# EAGLE board Panel EKO2 (EAGLE 5.10), part 1 of 2
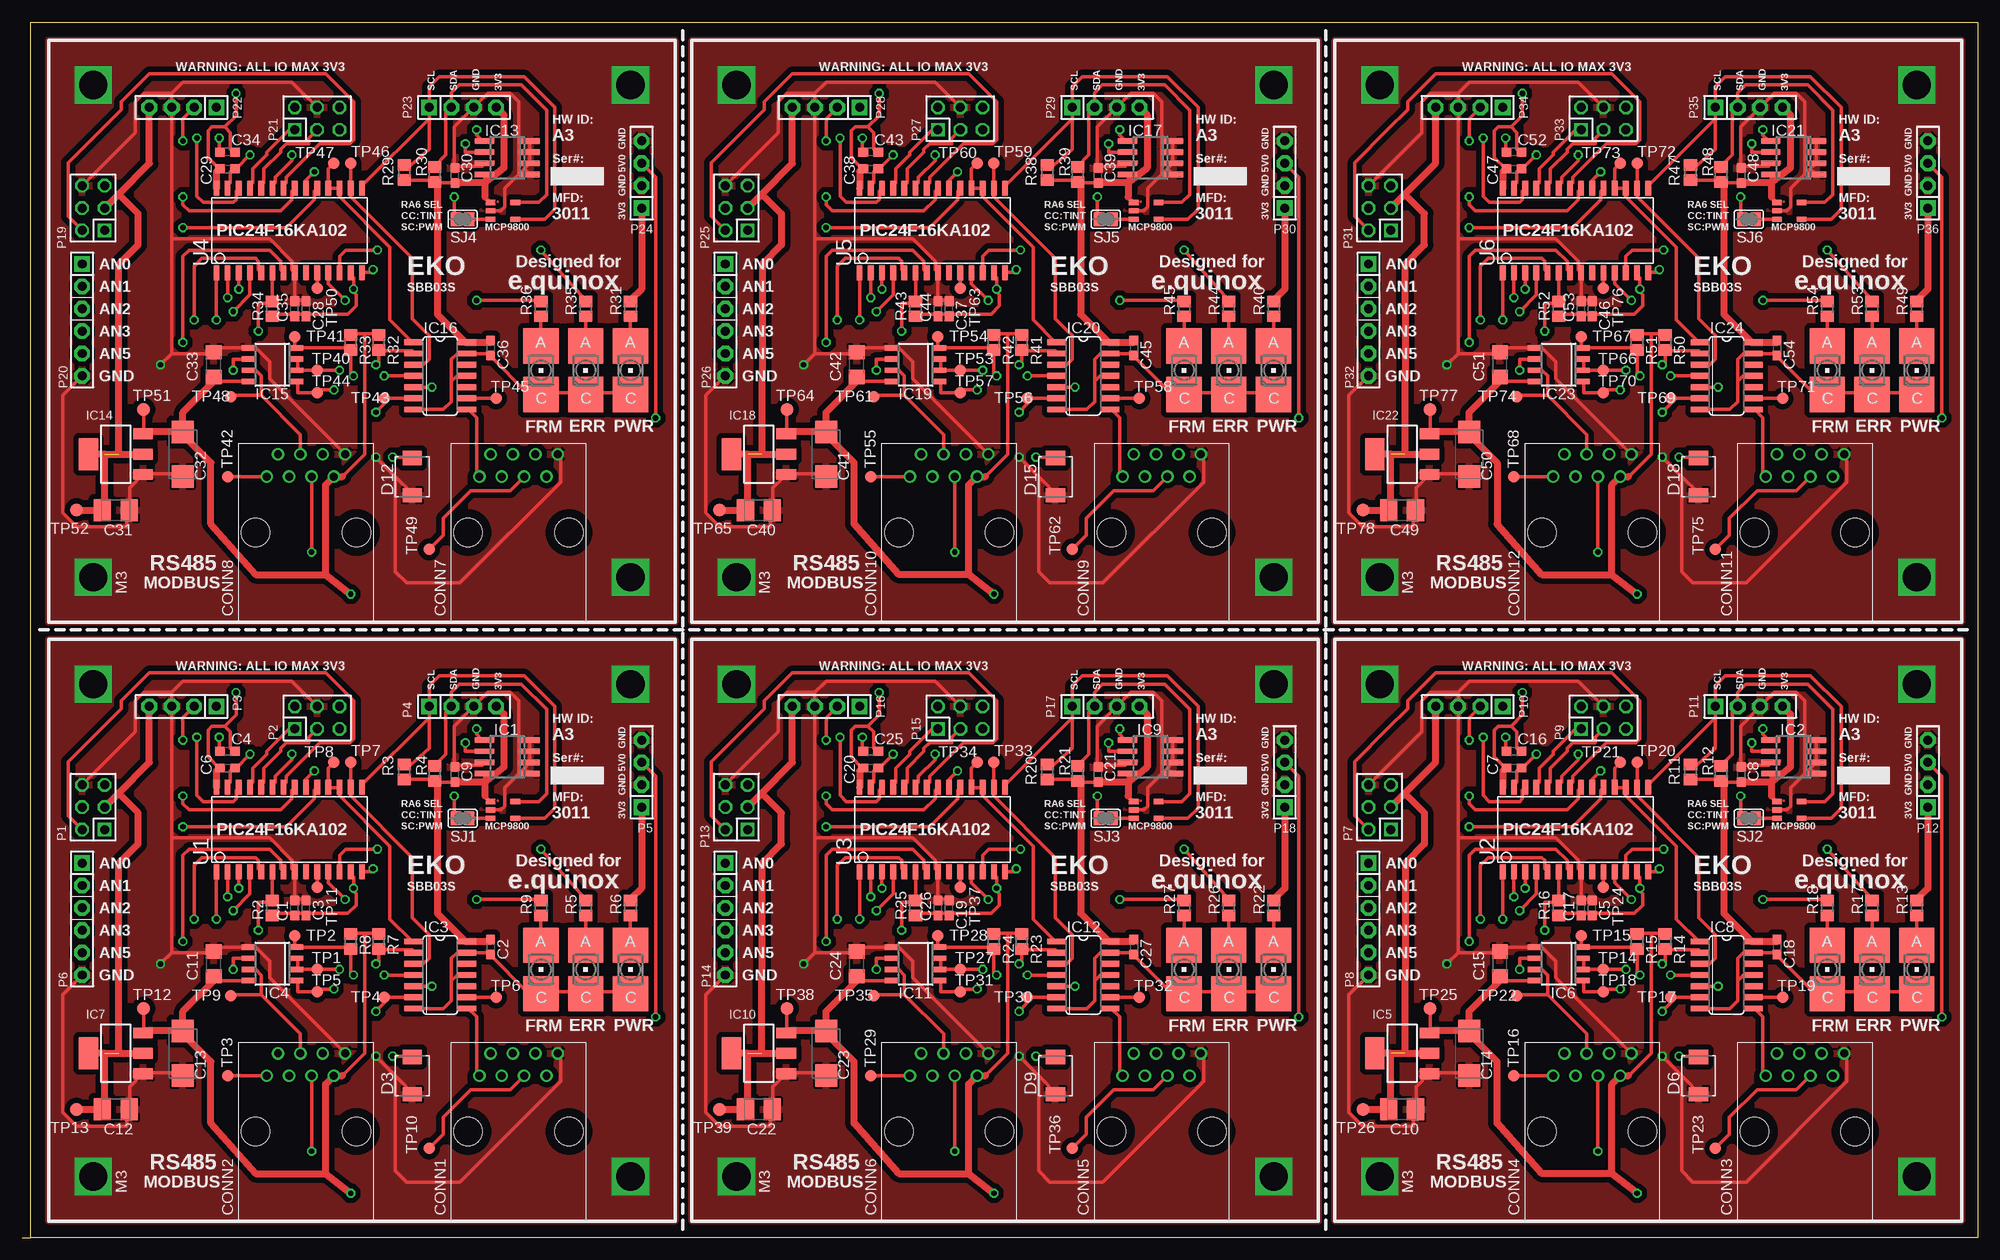
[diagram p0: board, top side]
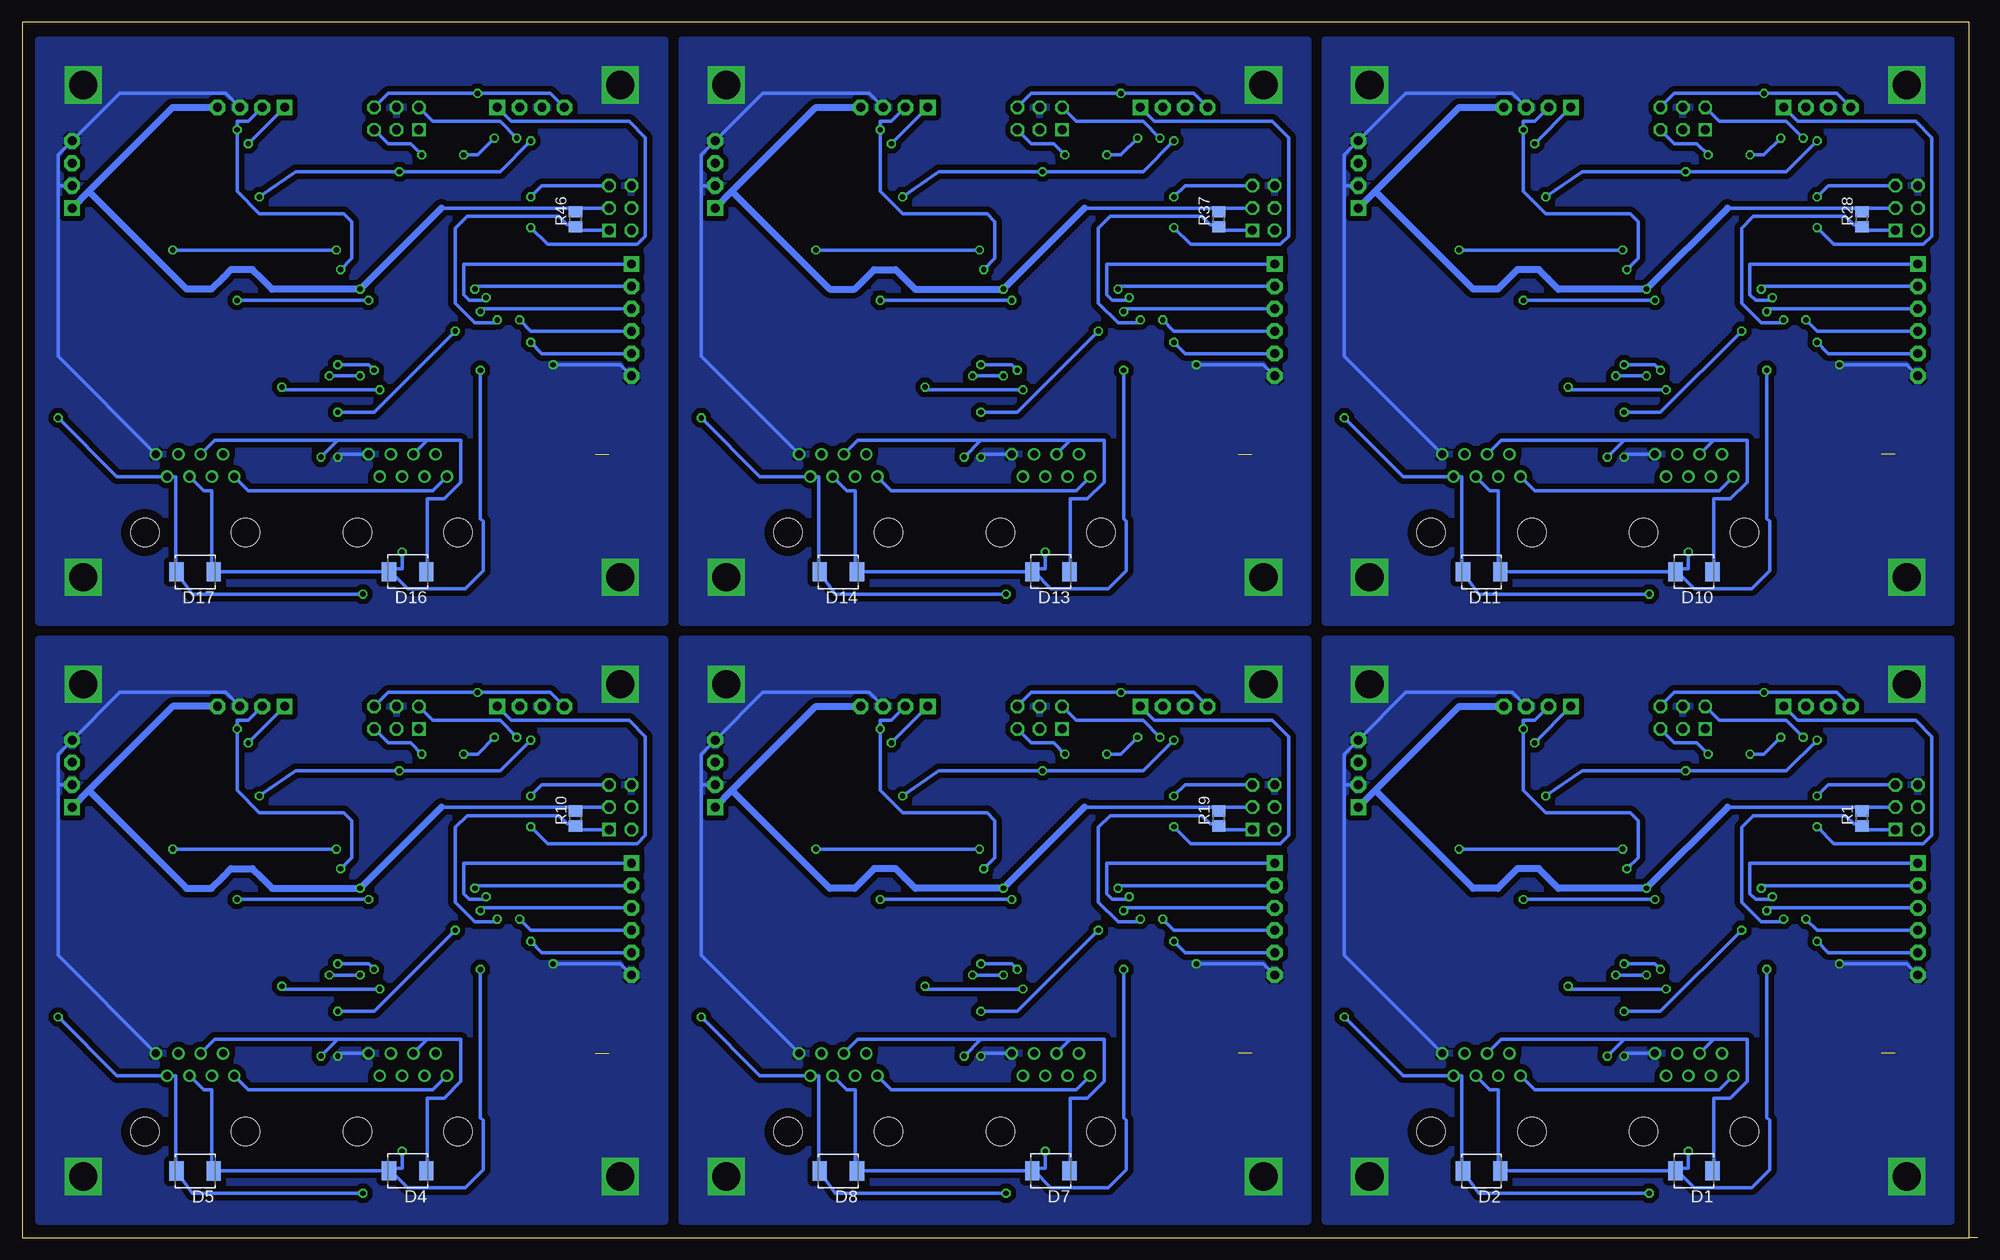
[diagram p1: board, bottom side, seen from below]

Size 222 x 138 mm. Coordinates in mm from the lower left corner, seen from the top.
Outline: 0,0 1,0
Outline: 1,0 1,138 222,138 222,0 1,0
Copper layers (1*16): Top 0.035mm / dielectric 1.5mm / Bottom 0.035mm
Design rules "default": minimum track width 10mil, minimum drill 24mil, track to track 8mil, track to pad 8mil, pad to pad 8mil, via to via 8mil, smd to smd 8mil, copper to edge 40mil, drill to drill 8mil, minimum pad ring 10mil, minimum via ring 8mil, stop-mask expansion 4mil, vias tented up to drill 0mil, thermal gap 10mil

## Footprints (pad centres in the part's own frame; a part is rotated, then mirrored left to right if it is on the bottom)
C0603 = smd 1.1 x 1: 1 -0.85,0; 2 0.85,0
B/3528-21R = smd 1.95 x 2.5: + 1.525,0; - -1.525,0
C1206 = smd 1.6 x 1.8: 1 -1.4,0; 2 1.4,0
C/6032-28R = smd 2.55 x 2.5: + 2.525,0; - -2.525,0
MHRJJ8NFRA = drill 0.9 round: P$1 -4.445,6.35; P$2 -3.175,8.89; P$3 -1.905,6.35; P$4 -0.635,8.89; P$5 0.635,6.35; P$6 1.905,8.89; P$7 3.175,6.35; P$8 4.445,8.89 | hole 3.25: -5.715,0; 5.715,0
SMB = smd 1.62 x 2.18: 1 -2.11,0; 2 2.11,0
SO-08 = smd 0.6 x 2.2: 1 -1.905,-2.6; 2 -0.635,-2.6; 3 0.635,-2.6; 4 1.905,-2.6; 5 1.905,2.6; 6 0.635,2.6; 7 -0.635,2.6; 8 -1.905,2.6
SO14 = smd 0.66 x 2.032: 1 -3.81,-3.073; 2 -2.54,-3.073; 3 -1.27,-3.073; 4 0,-3.073; 5 1.27,-3.073; 6 2.54,-3.073; 7 3.81,-3.073; 8 3.81,3.073; 9 2.54,3.073; 10 1.27,3.073; 11 0,3.073; 12 -1.27,3.073; 13 -2.54,3.073; 14 -3.81,3.073
D_R-PDSO-G8 = smd 0.6 x 1.5: 1 -1.905,-2.75; 2 -0.635,-2.75; 3 0.635,-2.75; 4 1.905,-2.75; 5 1.905,2.75; 6 0.635,2.75; 7 -0.635,2.75; 8 -1.905,2.75
SOT223 = smd 1.219 x 2.235: 1 -2.311,-3.099; 2 0,-3.099; 3 2.311,-3.099 | smd 3.6 x 2.2: 4 0,3.099
P-LCC-2 = smd 4 x 4: A 0,2.75; C 0,-2.75
DIL-100-2X03 = drill 1.016 square: 1 -2.54,-1.27 | drill 1.016 octagon: 2 -2.54,1.27; 3 0,-1.27; 4 0,1.27; 5 2.54,-1.27; 6 2.54,1.27
SIP-100-04-40 = drill 1.016 pad 1.778 square: 1 -3.81,0 | drill 1.016 pad 1.778 octagon: 2 -1.27,0; 3 1.27,0; 4 3.81,0
SIP-100-06-40 = drill 1.016 pad 1.778 square: 1 -6.35,0 | drill 1.016 pad 1.778 octagon: 2 -3.81,0; 3 -1.27,0; 4 1.27,0; 5 3.81,0; 6 6.35,0
R0805 = smd 1.3 x 1.5: 1 -0.85,0; 2 0.85,0
SJ = smd 1.168 x 1.6: 1 -0.762,0; 2 0.762,0
TP13R = smd 1.3 x 1.3: TP 0,0
TP15R = smd 1.5 x 1.5: TP 0,0
SO28W = smd 0.65 x 1.7: 1 -7.62,-4.78; 2 -6.35,-4.78; 3 -5.08,-4.78; 4 -3.81,-4.78; 5 -2.54,-4.78; 6 -1.27,-4.78; 7 0,-4.78; 8 1.27,-4.78; 9 2.54,-4.78; 10 3.81,-4.78; 11 5.08,-4.78; 12 6.35,-4.78; 13 7.62,-4.78; 14 8.89,-4.78; 15 8.89,4.78; 16 7.62,4.78; 17 6.35,4.78; 18 5.08,4.78; 19 3.81,4.78; 20 2.54,4.78; 21 1.27,4.78; 22 0,4.78; 23 -1.27,4.78; 24 -2.54,4.78; 25 -3.81,4.78; 26 -5.08,4.78; 27 -6.35,4.78; 28 -7.62,4.78
SOT-23-5 = smd 0.6 x 1.1: ALERT 1.9,0; GND 0.95,0; SCLK 1.9,2.8; SDA 0,2.8; VDD 0,0

## Placement (x,y rotation side)
C1  [C0603]  30.95,37.45 90 top
C2  [C0603]  53.18,33.01 270 top
C3  [C0603]  32.23,37.45 90 top
C4  [C0603]  23.34,53.33 0 top
C5  [C0603]  178.22,37.45 90 top
C6  [C0603]  23.34,55.23 180 top
C7  [C0603]  169.34,55.23 180 top
C8  [C0603]  195.14,52.58 90 top
C9  [C0603]  49.14,52.58 90 top
C10  100uF  [B/3528-21R]  156.63,14.6 180 top
C11  0.1uF  [C1206]  21.75,31.11 90 top
C12  100uF  [B/3528-21R]  10.63,14.6 180 top
C13  10uF  [C/6032-28R]  18.25,20.95 90 top
C14  10uF  [C/6032-28R]  164.25,20.95 90 top
C15  0.1uF  [C1206]  167.75,31.11 90 top
C16  [C0603]  169.34,53.33 0 top
C17  [C0603]  176.96,37.45 90 top
C18  [C0603]  199.18,33.01 270 top
C19  [C0603]  105.22,37.45 90 top
C20  [C0603]  96.33,55.23 180 top
C21  [C0603]  122.14,52.58 90 top
C22  100uF  [B/3528-21R]  83.64,14.6 180 top
C23  10uF  [C/6032-28R]  91.25,20.95 90 top
C24  0.1uF  [C1206]  94.75,31.11 90 top
C25  [C0603]  96.33,53.33 0 top
C26  [C0603]  103.95,37.45 90 top
C27  [C0603]  126.18,33.01 270 top
C28  [C0603]  32.23,105.45 90 top
C29  [C0603]  23.34,123.23 180 top
C30  [C0603]  49.14,120.58 90 top
C31  100uF  [B/3528-21R]  10.63,82.59 180 top
C32  10uF  [C/6032-28R]  18.25,88.94 90 top
C33  0.1uF  [C1206]  21.75,99.11 90 top
C34  [C0603]  23.34,121.33 0 top
C35  [C0603]  30.95,105.45 90 top
C36  [C0603]  53.18,101.01 270 top
C37  [C0603]  105.22,105.45 90 top
C38  [C0603]  96.33,123.23 180 top
C39  [C0603]  122.14,120.58 90 top
C40  100uF  [B/3528-21R]  83.64,82.59 180 top
C41  10uF  [C/6032-28R]  91.25,88.94 90 top
C42  0.1uF  [C1206]  94.75,99.11 90 top
C43  [C0603]  96.33,121.33 0 top
C44  [C0603]  103.95,105.45 90 top
C45  [C0603]  126.18,101.01 270 top
C46  [C0603]  178.22,105.45 90 top
C47  [C0603]  169.34,123.23 180 top
C48  [C0603]  195.14,120.58 90 top
C49  100uF  [B/3528-21R]  156.63,82.59 180 top
C50  10uF  [C/6032-28R]  164.25,88.94 90 top
C51  0.1uF  [C1206]  167.75,99.11 90 top
C52  [C0603]  169.34,121.33 0 top
C53  [C0603]  176.96,105.45 90 top
C54  [C0603]  199.18,101.01 270 top
CONN1  MHRJJ88NFRA  [MHRJJ8NFRA]  56.35,12.05 0 top
CONN2  MHRJJ88NFRA  [MHRJJ8NFRA]  32.23,12.05 0 top
CONN3  MHRJJ88NFRA  [MHRJJ8NFRA]  202.35,12.05 0 top
CONN4  MHRJJ88NFRA  [MHRJJ8NFRA]  178.22,12.05 0 top
CONN5  MHRJJ88NFRA  [MHRJJ8NFRA]  129.35,12.05 0 top
CONN6  MHRJJ88NFRA  [MHRJJ8NFRA]  105.22,12.05 0 top
CONN7  MHRJJ88NFRA  [MHRJJ8NFRA]  56.35,80.06 0 top
CONN8  MHRJJ88NFRA  [MHRJJ8NFRA]  32.23,80.06 0 top
CONN9  MHRJJ88NFRA  [MHRJJ8NFRA]  129.35,80.06 0 top
CONN10  MHRJJ88NFRA  [MHRJJ8NFRA]  105.22,80.06 0 top
CONN11  MHRJJ88NFRA  [MHRJJ8NFRA]  202.35,80.06 0 top
CONN12  MHRJJ88NFRA  [MHRJJ8NFRA]  178.22,80.06 0 top
D1  P6SMB12CA  [SMB]  32.23,7.62 180 bottom
D2  P6SMB12CA  [SMB]  56.34,7.6 180 bottom
D3  P6SMB12CA  [SMB]  44.29,18.41 90 top
D4  P6SMB12CA  [SMB]  178.23,7.62 180 bottom
D5  P6SMB12CA  [SMB]  202.34,7.6 180 bottom
D6  P6SMB12CA  [SMB]  190.29,18.41 90 top
D7  P6SMB12CA  [SMB]  105.23,7.62 180 bottom
D8  P6SMB12CA  [SMB]  129.34,7.6 180 bottom
D9  P6SMB12CA  [SMB]  117.29,18.41 90 top
D10  P6SMB12CA  [SMB]  32.23,75.62 180 bottom
D11  P6SMB12CA  [SMB]  56.34,75.6 180 bottom
D12  P6SMB12CA  [SMB]  44.29,86.41 90 top
D13  P6SMB12CA  [SMB]  105.23,75.62 180 bottom
D14  P6SMB12CA  [SMB]  129.34,75.6 180 bottom
D15  P6SMB12CA  [SMB]  117.29,86.41 90 top
D16  P6SMB12CA  [SMB]  178.23,75.62 180 bottom
D17  P6SMB12CA  [SMB]  202.34,75.6 180 bottom
D18  P6SMB12CA  [SMB]  190.29,86.41 90 top
IC1  24AA01SN  [SO-08]  55.09,54.6 90 top
IC2  24AA01SN  [SO-08]  201.09,54.6 90 top
IC3  7407D  [SO14]  47.47,29.84 270 top
IC4  SP483E  [D_R-PDSO-G8]  28.41,31.11 90 top
IC5  TLV1117  [SOT223]  156.63,20.95 90 top
IC6  SP483E  [D_R-PDSO-G8]  174.41,31.11 90 top
IC7  TLV1117  [SOT223]  10.63,20.95 90 top
IC8  7407D  [SO14]  193.47,29.84 270 top
IC9  24AA01SN  [SO-08]  128.08,54.6 90 top
IC10  TLV1117  [SOT223]  83.64,20.95 90 top
IC11  SP483E  [D_R-PDSO-G8]  101.42,31.11 90 top
IC12  7407D  [SO14]  120.47,29.84 270 top
IC13  24AA01SN  [SO-08]  55.09,122.6 90 top
IC14  TLV1117  [SOT223]  10.63,88.94 90 top
IC15  SP483E  [D_R-PDSO-G8]  28.41,99.11 90 top
IC16  7407D  [SO14]  47.47,97.83 270 top
IC17  24AA01SN  [SO-08]  128.08,122.6 90 top
IC18  TLV1117  [SOT223]  83.64,88.94 90 top
IC19  SP483E  [D_R-PDSO-G8]  101.42,99.11 90 top
IC20  7407D  [SO14]  120.47,97.83 270 top
IC21  24AA01SN  [SO-08]  201.09,122.6 90 top
IC22  TLV1117  [SOT223]  156.63,88.94 90 top
IC23  SP483E  [D_R-PDSO-G8]  174.41,99.11 90 top
IC24  7407D  [SO14]  193.47,97.83 270 top
LED1  RED  [P-LCC-2]  63.98,30.47 0 top
LED2  AMBER  [P-LCC-2]  58.9,30.47 0 top
LED3  GREEN  [P-LCC-2]  215.06,30.47 0 top
LED4  RED  [P-LCC-2]  209.97,30.47 0 top
LED5  AMBER  [P-LCC-2]  204.9,30.47 0 top
LED6  GREEN  [P-LCC-2]  142.06,30.47 0 top
LED7  RED  [P-LCC-2]  136.97,30.47 0 top
LED8  GREEN  [P-LCC-2]  69.06,30.47 0 top
LED9  AMBER  [P-LCC-2]  131.9,30.47 0 top
LED10  GREEN  [P-LCC-2]  69.06,98.47 0 top
LED11  RED  [P-LCC-2]  63.98,98.47 0 top
LED12  AMBER  [P-LCC-2]  58.9,98.47 0 top
LED13  GREEN  [P-LCC-2]  142.06,98.47 0 top
LED14  RED  [P-LCC-2]  136.97,98.47 0 top
LED15  AMBER  [P-LCC-2]  131.9,98.47 0 top
LED16  GREEN  [P-LCC-2]  215.06,98.47 0 top
LED17  RED  [P-LCC-2]  209.97,98.47 0 top
LED18  AMBER  [P-LCC-2]  204.9,98.47 0 top
P1  ICSP  [DIL-100-2X03]  8.09,48.88 90 top
P2  ANALOG IO 2  [DIL-100-2X03]  33.49,59.05 0 top
P3  COMP  [SIP-100-04-40]  18.25,60.31 180 top
P4  I2C1  [SIP-100-04-40]  50.01,60.31 0 top
P5  PWR  [SIP-100-04-40]  70.33,52.7 90 top
P6  ANALOG IO  [SIP-100-06-40]  6.83,36.19 270 top
P7  ICSP  [DIL-100-2X03]  154.09,48.88 90 top
P8  ANALOG IO  [SIP-100-06-40]  152.82,36.19 270 top
P9  ANALOG IO 2  [DIL-100-2X03]  179.5,59.05 0 top
P10  COMP  [SIP-100-04-40]  164.25,60.31 180 top
P11  I2C1  [SIP-100-04-40]  196,60.31 0 top
P12  PWR  [SIP-100-04-40]  216.32,52.7 90 top
P13  ICSP  [DIL-100-2X03]  81.09,48.88 90 top
P14  ANALOG IO  [SIP-100-06-40]  79.83,36.19 270 top
P15  ANALOG IO 2  [DIL-100-2X03]  106.5,59.05 0 top
P16  COMP  [SIP-100-04-40]  91.25,60.31 180 top
P17  I2C1  [SIP-100-04-40]  123,60.31 0 top
P18  PWR  [SIP-100-04-40]  143.32,52.7 90 top
P19  ICSP  [DIL-100-2X03]  8.09,116.89 90 top
P20  ANALOG IO  [SIP-100-06-40]  6.83,104.19 270 top
P21  ANALOG IO 2  [DIL-100-2X03]  33.49,127.05 0 top
P22  COMP  [SIP-100-04-40]  18.25,128.31 180 top
P23  I2C1  [SIP-100-04-40]  50.01,128.31 0 top
P24  PWR  [SIP-100-04-40]  70.33,120.69 90 top
P25  ICSP  [DIL-100-2X03]  81.09,116.89 90 top
P26  ANALOG IO  [SIP-100-06-40]  79.83,104.19 270 top
P27  ANALOG IO 2  [DIL-100-2X03]  106.5,127.05 0 top
P28  COMP  [SIP-100-04-40]  91.25,128.31 180 top
P29  I2C1  [SIP-100-04-40]  123,128.31 0 top
P30  PWR  [SIP-100-04-40]  143.32,120.69 90 top
P31  ICSP  [DIL-100-2X03]  154.09,116.89 90 top
P32  ANALOG IO  [SIP-100-06-40]  152.82,104.19 270 top
P33  ANALOG IO 2  [DIL-100-2X03]  179.5,127.05 0 top
P34  COMP  [SIP-100-04-40]  164.25,128.31 180 top
P35  I2C1  [SIP-100-04-40]  196,128.31 0 top
P36  PWR  [SIP-100-04-40]  216.32,120.69 90 top
R1  10k  [R0805]  13.18,47.62 90 bottom
R2  2.7K  [R0805]  28.41,37.45 90 top
R3  [R0805]  43.38,52.9 270 top
R4  [R0805]  46.83,52.7 270 top
R5  390  [R0805]  63.98,37.45 90 top
R6  390  [R0805]  69.06,37.45 90 top
R7  4.7k  [R0805]  40.48,33.65 270 top
R8  4.7k  [R0805]  37.3,33.65 270 top
R9  390  [R0805]  58.9,37.45 90 top
R10  10k  [R0805]  159.18,47.62 90 bottom
R11  [R0805]  189.38,52.9 270 top
R12  [R0805]  192.83,52.7 270 top
R13  390  [R0805]  215.06,37.45 90 top
R14  4.7k  [R0805]  186.48,33.65 270 top
R15  4.7k  [R0805]  183.31,33.65 270 top
R16  2.7K  [R0805]  174.41,37.45 90 top
R17  390  [R0805]  209.97,37.45 90 top
R18  390  [R0805]  204.9,37.45 90 top
R19  10k  [R0805]  86.17,47.62 90 bottom
R20  [R0805]  116.38,52.9 270 top
R21  [R0805]  119.83,52.7 270 top
R22  390  [R0805]  142.06,37.45 90 top
R23  4.7k  [R0805]  113.48,33.65 270 top
R24  4.7k  [R0805]  110.31,33.65 270 top
R25  2.7K  [R0805]  101.42,37.45 90 top
R26  390  [R0805]  136.97,37.45 90 top
R27  390  [R0805]  131.9,37.45 90 top
R28  10k  [R0805]  13.18,115.61 90 bottom
R29  [R0805]  43.38,120.9 270 top
R30  [R0805]  46.83,120.69 270 top
R31  390  [R0805]  69.06,105.45 90 top
R32  4.7k  [R0805]  40.48,101.64 270 top
R33  4.7k  [R0805]  37.3,101.64 270 top
R34  2.7K  [R0805]  28.41,105.45 90 top
R35  390  [R0805]  63.98,105.45 90 top
R36  390  [R0805]  58.9,105.45 90 top
R37  10k  [R0805]  86.17,115.61 90 bottom
R38  [R0805]  116.38,120.9 270 top
R39  [R0805]  119.83,120.69 270 top
R40  390  [R0805]  142.06,105.45 90 top
R41  4.7k  [R0805]  113.48,101.64 270 top
R42  4.7k  [R0805]  110.31,101.64 270 top
R43  2.7K  [R0805]  101.42,105.45 90 top
R44  390  [R0805]  136.97,105.45 90 top
R45  390  [R0805]  131.9,105.45 90 top
R46  10k  [R0805]  159.18,115.61 90 bottom
R47  [R0805]  189.38,120.9 270 top
R48  [R0805]  192.83,120.69 270 top
R49  390  [R0805]  215.06,105.45 90 top
R50  4.7k  [R0805]  186.48,101.64 270 top
R51  4.7k  [R0805]  183.31,101.64 270 top
R52  2.7K  [R0805]  174.41,105.45 90 top
R53  390  [R0805]  209.97,105.45 90 top
R54  390  [R0805]  204.9,105.45 90 top
SJ1  [SJ]  50.01,47.62 0 top
SJ2  [SJ]  196,47.62 0 top
SJ3  [SJ]  123,47.62 0 top
SJ4  [SJ]  50.01,115.61 0 top
SJ5  [SJ]  123,115.61 0 top
SJ6  [SJ]  196,115.61 0 top
TP1  TPTP13R  [TP13R]  33.49,30.47 0 top
TP2  TPTP13R  [TP13R]  30.95,34.28 0 top
TP3  TPTP13R  [TP13R]  23.34,18.41 0 top
TP4  TPTP13R  [TP13R]  41.12,27.3 0 top
TP5  TPTP13R  [TP13R]  33.49,27.93 0 top
TP6  TPTP13R  [TP13R]  53.81,27.3 0 top
TP7  TPTP13R  [TP13R]  37.3,53.97 0 top
TP8  TPTP13R  [TP13R]  35.4,53.97 0 top
TP9  TPTP13R  [TP13R]  23.67,27.47 0 top
TP10  TPTP13R  [TP13R]  46.2,10.15 0 top
TP11  TPTP13R  [TP13R]  33.49,39.79 0 top
TP12  TPTP15R  [TP15R]  13.81,26.02 0 top
TP13  3V3  [TP15R]  6.19,14.6 0 top
TP14  TPTP13R  [TP13R]  179.5,30.47 0 top
TP15  TPTP13R  [TP13R]  176.96,34.28 0 top
TP16  TPTP13R  [TP13R]  169.34,18.41 0 top
TP17  TPTP13R  [TP13R]  187.12,27.3 0 top
TP18  TPTP13R  [TP13R]  179.5,27.93 0 top
TP19  TPTP13R  [TP13R]  199.81,27.3 0 top
TP20  TPTP13R  [TP13R]  183.31,53.97 0 top
TP21  TPTP13R  [TP13R]  181.4,53.97 0 top
TP22  TPTP13R  [TP13R]  169.67,27.47 0 top
TP23  TPTP13R  [TP13R]  192.19,10.15 0 top
TP24  TPTP13R  [TP13R]  179.5,39.79 0 top
TP25  TPTP15R  [TP15R]  159.81,26.02 0 top
TP26  3V3  [TP15R]  152.19,14.6 0 top
TP27  TPTP13R  [TP13R]  106.5,30.47 0 top
TP28  TPTP13R  [TP13R]  103.95,34.28 0 top
TP29  TPTP13R  [TP13R]  96.33,18.41 0 top
TP30  TPTP13R  [TP13R]  114.11,27.3 0 top
TP31  TPTP13R  [TP13R]  106.5,27.93 0 top
TP32  TPTP13R  [TP13R]  126.81,27.3 0 top
TP33  TPTP13R  [TP13R]  110.31,53.97 0 top
TP34  TPTP13R  [TP13R]  108.4,53.97 0 top
TP35  TPTP13R  [TP13R]  96.67,27.47 0 top
TP36  TPTP13R  [TP13R]  119.19,10.15 0 top
TP37  TPTP13R  [TP13R]  106.5,39.79 0 top
TP38  TPTP15R  [TP15R]  86.81,26.02 0 top
TP39  3V3  [TP15R]  79.19,14.6 0 top
TP40  TPTP13R  [TP13R]  33.49,98.47 0 top
TP41  TPTP13R  [TP13R]  30.95,102.28 0 top
TP42  TPTP13R  [TP13R]  23.34,86.41 0 top
TP43  TPTP13R  [TP13R]  41.12,95.3 0 top
TP44  TPTP13R  [TP13R]  33.49,95.93 0 top
TP45  TPTP13R  [TP13R]  53.81,95.3 0 top
TP46  TPTP13R  [TP13R]  37.3,121.97 0 top
TP47  TPTP13R  [TP13R]  35.4,121.97 0 top
TP48  TPTP13R  [TP13R]  23.67,95.47 0 top
TP49  TPTP13R  [TP13R]  46.2,78.15 0 top
TP50  TPTP13R  [TP13R]  33.49,107.79 0 top
TP51  TPTP15R  [TP15R]  13.81,94.03 0 top
TP52  3V3  [TP15R]  6.19,82.59 0 top
TP53  TPTP13R  [TP13R]  106.5,98.47 0 top
TP54  TPTP13R  [TP13R]  103.95,102.28 0 top
TP55  TPTP13R  [TP13R]  96.33,86.41 0 top
TP56  TPTP13R  [TP13R]  114.11,95.3 0 top
TP57  TPTP13R  [TP13R]  106.5,95.93 0 top
TP58  TPTP13R  [TP13R]  126.81,95.3 0 top
TP59  TPTP13R  [TP13R]  110.31,121.97 0 top
TP60  TPTP13R  [TP13R]  108.4,121.97 0 top
TP61  TPTP13R  [TP13R]  96.67,95.47 0 top
TP62  TPTP13R  [TP13R]  119.19,78.15 0 top
TP63  TPTP13R  [TP13R]  106.5,107.79 0 top
TP64  TPTP15R  [TP15R]  86.81,94.03 0 top
TP65  3V3  [TP15R]  79.19,82.59 0 top
TP66  TPTP13R  [TP13R]  179.5,98.47 0 top
TP67  TPTP13R  [TP13R]  176.96,102.28 0 top
TP68  TPTP13R  [TP13R]  169.34,86.41 0 top
TP69  TPTP13R  [TP13R]  187.12,95.3 0 top
TP70  TPTP13R  [TP13R]  179.5,95.93 0 top
TP71  TPTP13R  [TP13R]  199.81,95.3 0 top
TP72  TPTP13R  [TP13R]  183.31,121.97 0 top
TP73  TPTP13R  [TP13R]  181.4,121.97 0 top
TP74  TPTP13R  [TP13R]  169.67,95.47 0 top
TP75  TPTP13R  [TP13R]  192.19,78.15 0 top
TP76  TPTP13R  [TP13R]  179.5,107.79 0 top
TP77  TPTP15R  [TP15R]  159.81,94.03 0 top
TP78  3V3  [TP15R]  152.19,82.59 0 top
U1  PIC24F16KA102-I/SPSOIC  [SO28W]  29.68,46.34 0 top
U2  PIC24F16KA102-I/SPSOIC  [SO28W]  175.69,46.34 0 top
U3  PIC24F16KA102-I/SPSOIC  [SO28W]  102.69,46.34 0 top
U4  PIC24F16KA102-I/SPSOIC  [SO28W]  29.68,114.34 0 top
U5  PIC24F16KA102-I/SPSOIC  [SO28W]  102.69,114.34 0 top
U6  PIC24F16KA102-I/SPSOIC  [SO28W]  175.69,114.34 0 top
U$1  MCP9800  [SOT-23-5]  53.18,49.52 270 top
U$2  MCP9800  [SOT-23-5]  199.18,49.52 270 top
U$3  MCP9800  [SOT-23-5]  126.18,49.52 270 top
U$4  MCP9800  [SOT-23-5]  53.18,117.52 270 top
U$5  MCP9800  [SOT-23-5]  126.18,117.52 270 top
U$6  MCP9800  [SOT-23-5]  199.18,117.52 270 top

## Library data of the parts
C1-C54 R1-R54 = resistor
CONN1-CONN12 U1-U6 = eko-parts
D1-D18 = _hhn_suppressor_SMAJ_SM6T_P6SMB
IC1 IC2 IC9 IC13 IC17 IC21 = microchip; MF: MICROCHIP; MPN: 24AA01/SN; OC_FARNELL: 1331268; OC_NEWARK: 89C9792
IC3 IC8 IC12 IC16 IC20 IC24 = 74xx-eu
IC4 IC6 IC11 IC15 IC19 IC23 = 751xx
IC5 IC7 IC10 IC14 IC18 IC22 = SparkFun
LED1-LED18 = led
P1-P36 = con-headers-jp
SJ1-SJ6 = jumper
TP1-TP78 = testpad
U$1-U$6 = atmospheric

## Nets
0V: C1.2 C3.2 C9.2 C11.2 C12.- C13.- CONN1.P$8 CONN2.P$8 D3.1 IC1.1 IC1.2 IC1.3 IC1.4 IC1.7 IC4.5 IC7.1 P1.6 P2.4 P3.3 P4.3 P5.2 P5.4 P6.6 U1.8 U$1.GND
0V1: C5.2 C8.2 C10.- C14.- C15.2 C17.2 CONN3.P$8 CONN4.P$8 D6.1 IC2.1 IC2.2 IC2.3 IC2.4 IC2.7 IC5.1 IC6.5 P7.6 P8.6 P9.4 P10.3 P11.3 P12.2 P12.4 U2.8 U$2.GND
0V2: C19.2 C21.2 C22.- C23.- C24.2 C26.2 CONN5.P$8 CONN6.P$8 D9.1 IC9.1 IC9.2 IC9.3 IC9.4 IC9.7 IC10.1 IC11.5 P13.6 P14.6 P15.4 P16.3 P17.3 P18.2 P18.4 U3.8 U$3.GND
0V3: C28.2 C30.2 C31.- C32.- C33.2 C35.2 CONN7.P$8 CONN8.P$8 D12.1 IC13.1 IC13.2 IC13.3 IC13.4 IC13.7 IC14.1 IC15.5 P19.6 P20.6 P21.4 P22.3 P23.3 P24.2 P24.4 U4.8 U$4.GND
0V4: C37.2 C39.2 C40.- C41.- C42.2 C44.2 CONN9.P$8 CONN10.P$8 D15.1 IC17.1 IC17.2 IC17.3 IC17.4 IC17.7 IC18.1 IC19.5 P25.6 P26.6 P27.4 P28.3 P29.3 P30.2 P30.4 U5.8 U$5.GND
0V5: C46.2 C48.2 C49.- C50.- C51.2 C53.2 CONN11.P$8 CONN12.P$8 D18.1 IC21.1 IC21.2 IC21.3 IC21.4 IC21.7 IC22.1 IC23.5 P31.6 P32.6 P33.4 P34.3 P35.3 P36.2 P36.4 U6.8 U$6.GND
!MCLR!: P1.1 R1.1 U1.1
!MCLR!1: P7.1 R10.1 U2.1
!MCLR!2: P13.1 R19.1 U3.1
!MCLR!3: P19.1 R28.1 U4.1
!MCLR!4: P25.1 R37.1 U5.1
!MCLR!5: P31.1 R46.1 U6.1
!UART_RTS!: IC3.1 TP8.TP U1.17 U1.18
!UART_RTS!1: IC8.1 TP21.TP U2.17 U2.18
!UART_RTS!2: IC12.1 TP34.TP U3.17 U3.18
!UART_RTS!3: IC16.1 TP47.TP U4.17 U4.18
!UART_RTS!4: IC20.1 TP60.TP U5.17 U5.18
!UART_RTS!5: IC24.1 TP73.TP U6.17 U6.18
+3V1: C5.1 C7.1 C8.1 C10.+ C16.1 C17.1 C18.1 IC2.8 IC5.2 IC5.4 IC8.14 P7.3 P9.6 P10.4 P11.4 P12.1 R10.2 R11.2 R12.2 R13.2 R16.1 TP26.TP U2.13 U2.28 U$2.VDD
+3V2: C19.1 C20.1 C21.1 C22.+ C25.1 C26.1 C27.1 IC9.8 IC10.2 IC10.4 IC12.14 P13.3 P15.6 P16.4 P17.4 P18.1 R19.2 R20.2 R21.2 R22.2 R25.1 TP39.TP U3.13 U3.28 U$3.VDD
+3V3: C1.1 C2.1 C3.1 C4.1 C6.1 C9.1 C12.+ IC1.8 IC3.14 IC7.2 IC7.4 P1.3 P2.6 P3.4 P4.4 P5.1 R1.2 R2.1 R3.2 R4.2 R6.2 TP13.TP U1.13 U1.28 U$1.VDD
+3V4: C28.1 C29.1 C30.1 C31.+ C34.1 C35.1 C36.1 IC13.8 IC14.2 IC14.4 IC16.14 P19.3 P21.6 P22.4 P23.4 P24.1 R28.2 R29.2 R30.2 R31.2 R34.1 TP52.TP U4.13 U4.28 U$4.VDD
+3V5: C37.1 C38.1 C39.1 C40.+ C43.1 C44.1 C45.1 IC17.8 IC18.2 IC18.4 IC20.14 P25.3 P27.6 P28.4 P29.4 P30.1 R37.2 R38.2 R39.2 R40.2 R43.1 TP65.TP U5.13 U5.28 U$5.VDD
+3V6: C46.1 C47.1 C48.1 C49.+ C52.1 C53.1 C54.1 IC21.8 IC22.2 IC22.4 IC24.14 P31.3 P33.6 P34.4 P35.4 P36.1 R46.2 R47.2 R48.2 R49.2 R52.1 TP78.TP U6.13 U6.28 U$6.VDD
+5V: C11.1 C13.+ CONN1.P$7 CONN2.P$7 D2.2 IC4.8 IC7.3 P5.3 R7.1 R8.1 TP12.TP
+5V1: C14.+ C15.1 CONN3.P$7 CONN4.P$7 D5.2 IC5.3 IC6.8 P12.3 R14.1 R15.1 TP25.TP
+5V2: C23.+ C24.1 CONN5.P$7 CONN6.P$7 D8.2 IC10.3 IC11.8 P18.3 R23.1 R24.1 TP38.TP
+5V3: C32.+ C33.1 CONN7.P$7 CONN8.P$7 D11.2 IC14.3 IC15.8 P24.3 R32.1 R33.1 TP51.TP
+5V4: C41.+ C42.1 CONN9.P$7 CONN10.P$7 D14.2 IC18.3 IC19.8 P30.3 R41.1 R42.1 TP64.TP
+5V5: C50.+ C51.1 CONN11.P$7 CONN12.P$7 D17.2 IC22.3 IC23.8 P36.3 R50.1 R51.1 TP77.TP
AN0: P6.1 U1.2
AN1: P6.2 U1.3
AN2: P6.3 U1.4
AN3: P6.4 U1.5
AN4: P8.5 U2.7
AN5: P6.5 U1.7
AN6: P8.2 U2.3
AN7: P8.1 U2.2
AN8: P8.3 U2.4
AN9: P8.4 U2.5
AN10: P2.1 U1.25
AN11: P2.3 U1.24
AN12: P2.5 U1.23
AN13: P9.3 U2.24
AN14: P9.5 U2.23
AN15: P9.1 U2.25
AN16: P14.5 U3.7
AN17: P14.2 U3.3
AN18: P14.1 U3.2
AN19: P14.3 U3.4
AN20: P14.4 U3.5
AN21: P15.3 U3.24
AN22: P15.5 U3.23
AN23: P15.1 U3.25
AN24: P20.5 U4.7
AN25: P20.2 U4.3
AN26: P20.1 U4.2
AN27: P20.3 U4.4
AN28: P20.4 U4.5
AN29: P21.3 U4.24
AN30: P21.5 U4.23
AN31: P21.1 U4.25
AN32: P26.5 U5.7
AN33: P26.2 U5.3
AN34: P26.1 U5.2
AN35: P26.3 U5.4
AN36: P26.4 U5.5
AN37: P27.3 U5.24
AN38: P27.5 U5.23
AN39: P27.1 U5.25
AN40: P32.5 U6.7
AN41: P32.2 U6.3
AN42: P32.1 U6.2
AN43: P32.3 U6.4
AN44: P32.4 U6.5
AN45: P33.3 U6.24
AN46: P33.5 U6.23
AN47: P33.1 U6.25
BUS_INT1: IC3.9 TP6.TP
BUS_INT2: IC8.9 TP19.TP
BUS_INT3: IC12.9 TP32.TP
BUS_INT4: IC16.9 TP45.TP
BUS_INT5: IC20.9 TP58.TP
BUS_INT6: IC24.9 TP71.TP
DA: CONN1.P$5 CONN2.P$5 D1.2 D2.1 IC4.6 TP10.TP
DA1: CONN3.P$5 CONN4.P$5 D4.2 D5.1 IC6.6 TP23.TP
DA2: CONN5.P$5 CONN6.P$5 D7.2 D8.1 IC11.6 TP36.TP
DA3: CONN7.P$5 CONN8.P$5 D10.2 D11.1 IC15.6 TP49.TP
DA4: CONN9.P$5 CONN10.P$5 D13.2 D14.1 IC19.6 TP62.TP
DA5: CONN11.P$5 CONN12.P$5 D16.2 D17.1 IC23.6 TP75.TP
DB: CONN1.P$4 CONN2.P$4 D1.1 D3.2 IC4.7 TP9.TP
DB1: CONN3.P$4 CONN4.P$4 D4.1 D6.2 IC6.7 TP22.TP
DB2: CONN5.P$4 CONN6.P$4 D7.1 D9.2 IC11.7 TP35.TP
DB3: CONN7.P$4 CONN8.P$4 D10.1 D12.2 IC15.7 TP48.TP
DB4: CONN9.P$4 CONN10.P$4 D13.1 D15.2 IC19.7 TP61.TP
DB5: CONN11.P$4 CONN12.P$4 D16.1 D18.2 IC23.7 TP74.TP
GND: C2.2 IC3.7 IC3.11 IC3.13 LED1.C LED2.C LED8.C
GND1: C18.2 IC8.7 IC8.11 IC8.13 LED3.C LED4.C LED5.C
GND2: C27.2 IC12.7 IC12.11 IC12.13 LED6.C LED7.C LED9.C
GND3: C36.2 IC16.7 IC16.11 IC16.13 LED10.C LED11.C LED12.C
GND4: C45.2 IC20.7 IC20.11 IC20.13 LED13.C LED14.C LED15.C
GND5: C54.2 IC24.7 IC24.11 IC24.13 LED16.C LED17.C LED18.C
IC1: P3.1 U1.19
IC2: P10.1 U2.19
IC3: P16.1 U3.19
IC4: P22.1 U4.19
IC5: P28.1 U5.19
IC6: P34.1 U6.19
INTR: CONN1.P$1 CONN2.P$1 IC3.8 TP3.TP
INTR1: CONN3.P$1 CONN4.P$1 IC8.8 TP16.TP
INTR2: CONN5.P$1 CONN6.P$1 IC12.8 TP29.TP
INTR3: CONN7.P$1 CONN8.P$1 IC16.8 TP42.TP
INTR4: CONN9.P$1 CONN10.P$1 IC20.8 TP55.TP
INTR5: CONN11.P$1 CONN12.P$1 IC24.8 TP68.TP
LED_1: R9.2 U1.11
LED_2: R5.2 U1.12
LED_3: R18.2 U2.11
LED_4: R17.2 U2.12
LED_5: R27.2 U3.11
LED_6: R26.2 U3.12
LED_7: R36.2 U4.11
LED_8: R35.2 U4.12
LED_9: R45.2 U5.11
LED_10: R44.2 U5.12
LED_11: R54.2 U6.11
LED_12: R53.2 U6.12
N$1: C4.2 C6.2 U1.27
N$2: LED3.A R13.1
N$3: C7.2 C16.2 U2.27
N$4: SJ1.2 U$1.ALERT
N$5: LED1.A R5.1
N$6: LED2.A R9.1
N$7: LED4.A R17.1
N$8: LED5.A R18.1
N$9: SJ2.2 U$2.ALERT
N$10: LED6.A R22.1
N$11: C20.2 C25.2 U3.27
N$12: LED7.A R26.1
N$13: LED9.A R27.1
N$14: SJ3.2 U$3.ALERT
N$15: LED8.A R6.1
N$16: LED10.A R31.1
N$17: C29.2 C34.2 U4.27
N$18: LED11.A R35.1
N$19: LED12.A R36.1
N$20: SJ4.2 U$4.ALERT
N$21: LED13.A R40.1
N$22: C38.2 C43.2 U5.27
N$23: LED14.A R44.1
N$24: LED15.A R45.1
N$25: SJ5.2 U$5.ALERT
N$26: LED16.A R49.1
N$27: C47.2 C52.2 U6.27
N$28: LED17.A R53.1
N$29: LED18.A R54.1
N$30: SJ6.2 U$6.ALERT
OC1: P3.2 SJ1.1 U1.20
OC2: P10.2 SJ2.1 U2.20
OC3: P16.2 SJ3.1 U3.20
OC4: P22.2 SJ4.1 U4.20
OC5: P28.2 SJ5.1 U5.20
OC6: P34.2 SJ6.1 U6.20
OSCI: U1.9
OSCI1: U2.9
OSCI2: U3.9
OSCI3: U4.9
OSCI4: U5.9
OSCI5: U6.9
OSCO: TP11.TP U1.10
OSCO1: TP24.TP U2.10
OSCO2: TP37.TP U3.10
OSCO3: TP50.TP U4.10
OSCO4: TP63.TP U5.10
OSCO5: TP76.TP U6.10
PGC1: P7.2 U2.22
PGC2: P1.2 U1.22
PGC3: P13.2 U3.22
PGC4: P19.2 U4.22
PGC5: P25.2 U5.22
PGC6: P31.2 U6.22
PGD1: P7.5 U2.21
PGD2: P1.5 U1.21
PGD3: P13.5 U3.21
PGD4: P19.5 U4.21
PGD5: P25.5 U5.21
PGD6: P31.5 U6.21
RB1: P9.2 U2.26
RB2: P15.2 U3.26
RB3: P21.2 U4.26
RB4: P27.2 U5.26
RB5: P33.2 U6.26
RB15: P2.2 U1.26
SCL: IC1.6 P4.1 R3.1 U1.15 U$1.SCLK
SCL1: IC2.6 P11.1 R11.1 U2.15 U$2.SCLK
SCL2: IC9.6 P17.1 R20.1 U3.15 U$3.SCLK
SCL3: IC13.6 P23.1 R29.1 U4.15 U$4.SCLK
SCL4: IC17.6 P29.1 R38.1 U5.15 U$5.SCLK
SCL5: IC21.6 P35.1 R47.1 U6.15 U$6.SCLK
SDA: IC1.5 P4.2 R4.1 U1.14 U$1.SDA
SDA1: IC2.5 P11.2 R12.1 U2.14 U$2.SDA
SDA2: IC9.5 P17.2 R21.1 U3.14 U$3.SDA
SDA3: IC13.5 P23.2 R30.1 U4.14 U$4.SDA
SDA4: IC17.5 P29.2 R39.1 U5.14 U$5.SDA
SDA5: IC21.5 P35.2 R48.1 U6.14 U$6.SDA
UART_RTS_5V: IC3.2 IC4.2 IC4.3 R7.2 TP1.TP
UART_RTS_5V1: IC6.2 IC6.3 IC8.2 R14.2 TP14.TP
UART_RTS_5V2: IC11.2 IC11.3 IC12.2 R23.2 TP27.TP
UART_RTS_5V3: IC15.2 IC15.3 IC16.2 R32.2 TP40.TP
UART_RTS_5V4: IC19.2 IC19.3 IC20.2 R41.2 TP53.TP
UART_RTS_5V5: IC23.2 IC23.3 IC24.2 R50.2 TP66.TP
UART_RX: IC3.6 R2.2 TP4.TP U1.6
UART_RX1: IC8.6 R16.2 TP17.TP U2.6
UART_RX2: IC12.6 R25.2 TP30.TP U3.6
UART_RX3: IC16.6 R34.2 TP43.TP U4.6
UART_RX4: IC20.6 R43.2 TP56.TP U5.6
UART_RX5: IC24.6 R52.2 TP69.TP U6.6
UART_RX_5V: IC3.5 IC4.1 TP5.TP
UART_RX_5V1: IC6.1 IC8.5 TP18.TP
UART_RX_5V2: IC11.1 IC12.5 TP31.TP
UART_RX_5V3: IC15.1 IC16.5 TP44.TP
UART_RX_5V4: IC19.1 IC20.5 TP57.TP
UART_RX_5V5: IC23.1 IC24.5 TP70.TP
UART_TX: IC3.3 TP7.TP U1.16
UART_TX1: IC8.3 TP20.TP U2.16
UART_TX2: IC12.3 TP33.TP U3.16
UART_TX3: IC16.3 TP46.TP U4.16
UART_TX4: IC20.3 TP59.TP U5.16
UART_TX5: IC24.3 TP72.TP U6.16
UART_TX_5V: IC3.4 IC4.4 R8.2 TP2.TP
UART_TX_5V1: IC6.4 IC8.4 R15.2 TP15.TP
UART_TX_5V2: IC11.4 IC12.4 R24.2 TP28.TP
UART_TX_5V3: IC15.4 IC16.4 R33.2 TP41.TP
UART_TX_5V4: IC19.4 IC20.4 R42.2 TP54.TP
UART_TX_5V5: IC23.4 IC24.4 R51.2 TP67.TP

## Tracks (layer width: path | path; a pad name or v marks a point on that pad's centre or on a via)
0V  (via drill 0.61, 3.2 pad 0.41)
  Top 0.406: IC1.7 52.23,53.97 52.23,53.65 49.69,53.65 C9.2 49.37,53.65 49.05,53.97 49.05,58.09 P4.3 52.86,61.9 55.4,61.9 56.35,60.95 56.35,52.7 | 57.62,55.23 57.62,56.51 IC1.4 | 56.99,53.33 57.62,53.97 | 56.35,52.7 56.99,53.33 | 56.35,52.7 54.77,51.11 54.77,49.02 54.32,48.57 U$1.GND | 56.99,53.33 57.62,52.7 IC1.1 | 57.62,53.97 57.62,55.23 | 57.62,55.23 IC1.3 | 57.62,53.97 IC1.2 | C13.- 18.25,18.72 13.81,18.72 IC7.1 13.49,18.41 12.22,17.14 12.22,14.6 C12.- 11.9,14.6 11.9,12.69 6.19,12.69 4.6,14.28 4.6,27.61 P6.6 | v40.16,20.63 42.38,18.41 | 42.38,18.41 44.29,16.5 D3.1 | 30.95,38.41 32.23,38.41 C3.2 | 30.95,38.41 C1.2 | 30.95,38.41 U1.8 30.95,41.58 30.64,41.9 30.64,42.85 28.1,45.39 16.98,45.39 | 16.98,45.39 P3.3 16.98,61.9 | 16.98,32.38 21.75,32.38 C11.2 21.75,33.01 IC4.5 26.51,33.01 28.1,31.42 28.1,29.52 CONN2.P$8 | 16.98,32.38 16.98,45.39 | P1.6 12.86,57.46 12.86,60.95 13.81,61.9 16.98,61.9 | P2.4 30.64,63.17 18.25,63.17 16.98,61.9 | v15.71,31.11 16.98,32.38 | CONN1.P$8 61.12,20.63 61.12,17.77 49.69,6.34 43.66,6.34 42.38,7.61 42.38,18.41
  Bottom 0.406: CONN1.P$8 71.91,32.06 71.91,51.42 | 71.91,51.42 P5.2 | 71.91,51.42 71.91,54.92 P5.4 64.93,61.9 52.86,61.9 P4.3 | v40.16,20.63 39.84,20.95 CONN2.P$8 | P6.6 8.09,31.11 v15.71,31.11
  other vias: 8.09,6.97 8.09,62.85 69.06,62.85 69.06,6.97
  pour Top (isolate 0.61): 3.02,67.94 74.14,67.94 74.14,1.9 3.02,1.9
  pour Bottom (isolate 0.61): 3.02,67.94 74.14,67.94 74.14,1.9 3.02,1.9
0V1  (via drill 0.61, 3.2 pad 0.41)
  Top 0.406: IC2.7 198.23,53.97 198.23,53.65 195.69,53.65 C8.2 195.37,53.65 195.05,53.97 195.05,58.09 P11.3 198.86,61.9 201.4,61.9 202.35,60.95 202.35,52.7 | 203.62,55.23 203.62,56.51 IC2.4 | 202.99,53.33 203.62,53.97 | 202.35,52.7 202.99,53.33 | 202.35,52.7 200.77,51.11 200.77,49.02 200.32,48.57 U$2.GND | 202.99,53.33 203.62,52.7 IC2.1 | 203.62,53.97 203.62,55.23 | 203.62,55.23 IC2.3 | 203.62,53.97 IC2.2 | C14.- 164.25,18.72 159.81,18.72 IC5.1 159.49,18.41 158.22,17.14 158.22,14.6 C10.- 157.91,14.6 157.91,12.69 152.19,12.69 150.6,14.28 150.6,27.61 P8.6 | 188.38,18.41 v186.16,20.63 | 188.38,18.41 190.29,16.5 D6.1 | 176.96,38.41 178.22,38.41 C5.2 | 176.96,38.41 C17.2 | 176.96,38.41 U2.8 176.96,41.58 176.64,41.9 176.64,42.85 174.1,45.39 162.99,45.39 | 162.99,45.39 P10.3 162.99,61.9 | 162.99,32.38 167.75,32.38 C15.2 167.75,33.01 IC6.5 172.51,33.01 174.1,31.42 174.1,29.52 CONN4.P$8 | 162.99,32.38 162.99,45.39 | P7.6 158.86,57.46 158.86,60.95 159.81,61.9 162.99,61.9 | P9.4 176.64,63.17 164.25,63.17 162.99,61.9 | 162.99,32.38 v161.72,31.11 | CONN3.P$8 207.12,20.63 207.12,17.77 195.69,6.34 189.66,6.34 188.38,7.61 188.38,18.41
  Bottom 0.406: CONN3.P$8 217.91,32.06 217.91,51.42 | 217.91,51.42 P12.2 | 217.91,51.42 217.91,54.92 P12.4 210.93,61.9 198.86,61.9 P11.3 | v186.16,20.63 185.84,20.95 CONN4.P$8 | P8.6 154.09,31.11 v161.72,31.11
  other vias: 154.09,6.97 154.09,62.85 215.06,62.85 215.06,6.97
  pour Top (isolate 0.61): 149.01,67.94 220.13,67.94 220.13,1.9 149.01,1.9
  pour Bottom (isolate 0.61): 149.01,67.94 220.13,67.94 220.13,1.9 149.01,1.9
0V2  (via drill 0.61, 3.2 pad 0.41)
  Top 0.406: IC9.7 125.23,53.97 125.23,53.65 122.69,53.65 C21.2 122.37,53.65 122.05,53.97 122.05,58.09 P17.3 125.86,61.9 128.4,61.9 129.35,60.95 129.35,52.7 | 130.62,55.23 130.62,56.51 IC9.4 | 129.99,53.33 130.62,53.97 | 129.35,52.7 129.99,53.33 | 129.35,52.7 127.77,51.11 127.77,49.02 127.32,48.57 U$3.GND | 129.99,53.33 130.62,52.7 IC9.1 | 130.62,53.97 130.62,55.23 | 130.62,55.23 IC9.3 | 130.62,53.97 IC9.2 | C23.- 91.25,18.72 86.81,18.72 IC10.1 86.49,18.41 85.22,17.14 85.22,14.6 C22.- 84.91,14.6 84.91,12.69 79.19,12.69 77.6,14.28 77.6,27.61 P14.6 | v113.16,20.63 115.39,18.41 | 115.39,18.41 117.29,16.5 D9.1 | 103.95,38.41 105.22,38.41 C19.2 | 103.95,38.41 C26.2 | 103.95,38.41 U3.8 103.95,41.58 103.64,41.9 103.64,42.85 101.1,45.39 89.98,45.39 | 89.98,45.39 P16.3 89.98,61.9 | 89.98,32.38 94.75,32.38 C24.2 94.75,33.01 IC11.5 99.51,33.01 101.1,31.42 101.1,29.52 CONN6.P$8 | 89.98,32.38 89.98,45.39 | P13.6 85.86,57.46 85.86,60.95 86.81,61.9 89.98,61.9 | P15.4 103.64,63.17 91.25,63.17 89.98,61.9 | v88.72,31.11 89.98,32.38 | CONN5.P$8 134.12,20.63 134.12,17.77 122.69,6.34 116.66,6.34 115.39,7.61 115.39,18.41
  Bottom 0.406: CONN5.P$8 144.91,32.06 144.91,51.42 | 144.91,51.42 P18.2 | 144.91,51.42 144.91,54.92 P18.4 137.93,61.9 125.86,61.9 P17.3 | v113.16,20.63 112.84,20.95 CONN6.P$8 | P14.6 81.09,31.11 v88.72,31.11
  other vias: 81.09,6.97 81.09,62.85 142.06,62.85 142.06,6.97
  pour Top (isolate 0.61): 76.02,67.94 147.13,67.94 147.13,1.9 76.02,1.9
  pour Bottom (isolate 0.61): 76.02,67.94 147.13,67.94 147.13,1.9 76.02,1.9
0V3  (via drill 0.61, 3.2 pad 0.41)
  Top 0.406: IC13.7 52.23,121.97 52.23,121.65 49.69,121.65 C30.2 49.37,121.65 49.05,121.97 49.05,126.09 P23.3 52.86,129.9 55.4,129.9 56.35,128.95 56.35,120.69 | 57.62,123.23 57.62,124.5 IC13.4 | 56.99,121.33 57.62,121.97 | 56.35,120.69 56.99,121.33 | 56.35,120.69 54.77,119.11 54.77,117.02 54.32,116.57 U$4.GND | 56.99,121.33 57.62,120.69 IC13.1 | 57.62,121.97 57.62,123.23 | 57.62,123.23 IC13.3 | 57.62,121.97 IC13.2 | C32.- 18.25,86.72 13.81,86.72 IC14.1 13.49,86.41 12.22,85.14 12.22,82.59 C31.- 11.9,82.59 11.9,80.69 6.19,80.69 4.6,82.28 4.6,95.61 P20.6 | v40.16,88.63 42.38,86.41 | 42.38,86.41 44.29,84.5 D12.1 | 30.95,106.41 32.23,106.41 C28.2 | 30.95,106.41 C35.2 | 30.95,106.41 U4.8 30.95,109.58 30.64,109.9 30.64,110.85 28.1,113.39 16.98,113.39 | 16.98,113.39 P22.3 16.98,129.9 | 16.98,100.38 21.75,100.38 C33.2 21.75,101.01 IC15.5 26.51,101.01 28.1,99.42 28.1,97.52 CONN8.P$8 | 16.98,100.38 16.98,113.39 | P19.6 12.86,125.46 12.86,128.95 13.81,129.9 16.98,129.9 | P21.4 30.64,131.17 18.25,131.17 16.98,129.9 | v15.71,99.11 16.98,100.38 | CONN7.P$8 61.12,88.63 61.12,85.77 49.69,74.34 43.66,74.34 42.38,75.61 42.38,86.41
  Bottom 0.406: CONN7.P$8 71.91,100.06 71.91,119.42 | 71.91,119.42 P24.2 | 71.91,119.42 71.91,122.92 P24.4 64.93,129.9 52.86,129.9 P23.3 | v40.16,88.63 39.84,88.94 CONN8.P$8 | P20.6 8.09,99.11 v15.71,99.11
  other vias: 8.09,74.97 8.09,130.85 69.06,130.85 69.06,74.97
  pour Top (isolate 0.61): 3.02,135.94 74.14,135.94 74.14,69.89 3.02,69.89
  pour Bottom (isolate 0.61): 3.02,135.94 74.14,135.94 74.14,69.89 3.02,69.89
0V4  (via drill 0.61, 3.2 pad 0.41)
  Top 0.406: IC17.7 125.23,121.97 125.23,121.65 122.69,121.65 C39.2 122.37,121.65 122.05,121.97 122.05,126.09 P29.3 125.86,129.9 128.4,129.9 129.35,128.95 129.35,120.69 | 130.62,123.23 130.62,124.5 IC17.4 | 130.62,121.97 129.99,121.33 | 129.99,121.33 129.35,120.69 | 129.35,120.69 127.77,119.11 127.77,117.02 127.32,116.57 U$5.GND | 129.99,121.33 130.62,120.69 IC17.1 | 130.62,123.23 130.62,121.97 | 130.62,123.23 IC17.3 | 130.62,121.97 IC17.2 | C41.- 91.25,86.72 86.81,86.72 IC18.1 86.49,86.41 85.22,85.14 85.22,82.59 C40.- 84.91,82.59 84.91,80.69 79.19,80.69 77.6,82.28 77.6,95.61 P26.6 | 115.39,86.41 v113.16,88.63 | 115.39,86.41 117.29,84.5 D15.1 | 103.95,106.41 105.22,106.41 C37.2 | 103.95,106.41 C44.2 | 103.95,106.41 U5.8 103.95,109.58 103.64,109.9 103.64,110.85 101.1,113.39 89.98,113.39 | 89.98,113.39 P28.3 89.98,129.9 | 89.98,100.38 94.75,100.38 C42.2 94.75,101.01 IC19.5 99.51,101.01 101.1,99.42 101.1,97.52 CONN10.P$8 | 89.98,100.38 89.98,113.39 | P25.6 85.86,125.46 85.86,128.95 86.81,129.9 89.98,129.9 | P27.4 103.64,131.17 91.25,131.17 89.98,129.9 | 89.98,100.38 v88.72,99.11 | CONN9.P$8 134.12,88.63 134.12,85.77 122.69,74.34 116.66,74.34 115.39,75.61 115.39,86.41
  Bottom 0.406: CONN9.P$8 144.91,100.06 144.91,119.42 | 144.91,119.42 P30.2 | 144.91,119.42 144.91,122.92 P30.4 137.93,129.9 125.86,129.9 P29.3 | v113.16,88.63 112.84,88.94 CONN10.P$8 | P26.6 81.09,99.11 v88.72,99.11
  other vias: 81.09,74.97 81.09,130.85 142.06,130.85 142.06,74.97
  pour Top (isolate 0.61): 76.02,135.94 147.13,135.94 147.13,69.89 76.02,69.89
  pour Bottom (isolate 0.61): 76.02,135.94 147.13,135.94 147.13,69.89 76.02,69.89
0V5  (via drill 0.61, 3.2 pad 0.41)
  Top 0.406: IC21.7 198.23,121.97 198.23,121.65 195.69,121.65 C48.2 195.37,121.65 195.05,121.97 195.05,126.09 P35.3 198.86,129.9 201.4,129.9 202.35,128.95 202.35,120.69 | 203.62,123.23 203.62,124.5 IC21.4 | 202.99,121.33 203.62,121.97 | 202.35,120.69 202.99,121.33 | 202.35,120.69 200.77,119.11 200.77,117.02 200.32,116.57 U$6.GND | 202.99,121.33 203.62,120.69 IC21.1 | 203.62,121.97 203.62,123.23 | 203.62,123.23 IC21.3 | 203.62,121.97 IC21.2 | C50.- 164.25,86.72 159.81,86.72 IC22.1 159.49,86.41 158.22,85.14 158.22,82.59 C49.- 157.91,82.59 157.91,80.69 152.19,80.69 150.6,82.28 150.6,95.61 P32.6 | v186.16,88.63 188.38,86.41 | 188.38,86.41 190.29,84.5 D18.1 | 176.96,106.41 178.22,106.41 C46.2 | 176.96,106.41 C53.2 | 176.96,106.41 U6.8 176.96,109.58 176.64,109.9 176.64,110.85 174.1,113.39 162.99,113.39 | 162.99,113.39 P34.3 162.99,129.9 | 162.99,100.38 167.75,100.38 C51.2 167.75,101.01 IC23.5 172.51,101.01 174.1,99.42 174.1,97.52 CONN12.P$8 | 162.99,100.38 162.99,113.39 | P31.6 158.86,125.46 158.86,128.95 159.81,129.9 162.99,129.9 | P33.4 176.64,131.17 164.25,131.17 162.99,129.9 | v161.72,99.11 162.99,100.38 | CONN11.P$8 207.12,88.63 207.12,85.77 195.69,74.34 189.66,74.34 188.38,75.61 188.38,86.41
  Bottom 0.406: CONN11.P$8 217.91,100.06 217.91,119.42 | 217.91,119.42 P36.2 | 217.91,119.42 217.91,122.92 P36.4 210.93,129.9 198.86,129.9 P35.3 | v186.16,88.63 185.84,88.94 CONN12.P$8 | P32.6 154.09,99.11 v161.72,99.11
  other vias: 154.09,74.97 154.09,130.85 215.06,130.85 215.06,74.97
  pour Top (isolate 0.61): 149.01,135.94 220.13,135.94 220.13,69.89 149.01,69.89
  pour Bottom (isolate 0.61): 149.01,135.94 220.13,135.94 220.13,69.89 149.01,69.89
!MCLR!  (via drill 0.61)
  Top 0.406: v22.07,36.19 U1.1
  Bottom 0.406: P1.1 12.86,46.34 13.18,46.66 R1.1 13.18,46.98 14.13,46.98 15.08,47.93 25.48,47.93 26.83,46.59 26.83,38.09 24.61,35.87 22.38,35.87 v22.07,36.19
!MCLR!1  (via drill 0.61)
  Top 0.406: v168.06,36.19 U2.1
  Bottom 0.406: P7.1 158.86,46.34 159.18,46.66 R10.1 159.18,46.98 160.13,46.98 161.08,47.93 171.48,47.93 172.83,46.59 172.83,38.09 170.6,35.87 168.38,35.87 v168.06,36.19
!MCLR!2  (via drill 0.61)
  Top 0.406: v95.06,36.19 U3.1
  Bottom 0.406: P13.1 85.86,46.34 86.17,46.66 R19.1 86.17,46.98 87.13,46.98 88.08,47.93 98.48,47.93 99.83,46.59 99.83,38.09 97.61,35.87 95.38,35.87 v95.06,36.19
!MCLR!3  (via drill 0.61)
  Top 0.406: v22.07,104.19 U4.1
  Bottom 0.406: P19.1 12.86,114.34 13.18,114.66 R28.1 13.18,114.98 14.13,114.98 15.08,115.93 25.48,115.93 26.83,114.58 26.83,106.09 24.61,103.87 22.38,103.87 v22.07,104.19
!MCLR!4  (via drill 0.61)
  Top 0.406: v95.06,104.19 U5.1
  Bottom 0.406: P25.1 85.86,114.34 86.17,114.66 R37.1 86.17,114.98 87.13,114.98 88.08,115.93 98.48,115.93 99.83,114.58 99.83,106.09 97.61,103.87 95.38,103.87 v95.06,104.19
!MCLR!5  (via drill 0.61)
  Top 0.406: v168.06,104.19 U6.1
  Bottom 0.406: P31.1 158.86,114.34 159.18,114.66 R46.1 159.18,114.98 160.13,114.98 161.08,115.93 171.48,115.93 172.83,114.58 172.83,106.09 170.6,103.87 168.38,103.87 v168.06,104.19
!UART_RTS!
  Top 0.406: TP8.TP 34.77,53.33 U1.18 34.77,51.11 36.03,51.11 | 36.03,51.11 36.03,50.16 41.75,44.44 41.75,36.19 44.29,33.65 IC3.1 | 36.03,51.11 U1.17
!UART_RTS!1
  Top 0.406: TP21.TP 180.76,53.33 U2.18 180.76,51.11 182.03,51.11 | 182.03,51.11 182.03,50.16 187.75,44.44 187.75,36.19 190.29,33.65 IC8.1 | 182.03,51.11 U2.17
!UART_RTS!2
  Top 0.406: TP34.TP 107.77,53.33 U3.18 107.77,51.11 109.03,51.11 | 109.03,51.11 109.03,50.16 114.75,44.44 114.75,36.19 117.29,33.65 IC12.1 | 109.03,51.11 U3.17
!UART_RTS!3
  Top 0.406: TP47.TP 34.77,121.33 U4.18 34.77,119.11 36.03,119.11 | 36.03,119.11 36.03,118.16 41.75,112.44 41.75,104.19 44.29,101.64 IC16.1 | 36.03,119.11 U4.17
!UART_RTS!4
  Top 0.406: TP60.TP 107.77,121.33 U5.18 107.77,119.11 109.03,119.11 | 109.03,119.11 109.03,118.16 114.75,112.44 114.75,104.19 117.29,101.64 IC20.1 | 109.03,119.11 U5.17
!UART_RTS!5
  Top 0.406: TP73.TP 180.76,121.33 U6.18 180.76,119.11 182.03,119.11 | 182.03,119.11 182.03,118.16 187.75,112.44 187.75,104.19 190.29,101.64 IC24.1 | 182.03,119.11 U6.17
+3V1  (via drill 0.61)  (1 unrouted)
  Top 0.406: 215.06,38.41 R13.2 | 198.54,50.16 U$2.VDD | 198.54,51.74 198.54,52.7 IC2.8 | 199.18,33.65 C18.1 | 193.15,51.74 192.83,51.74 R12.2 | 193.15,51.74 195.37,51.74 C8.1 195.69,51.74 | R11.2 190.29,52.06 192.83,52.06 R12.2 | 196.32,33.65 IC8.14 | 193.15,51.74 R12.2 | C10.+ 155.37,14.6 | 178.22,36.82 176.96,36.82 | 176.96,36.82 174.41,36.82 R16.1 | 176.96,36.82 C17.1 | 178.22,36.82 182.99,36.82 183.94,37.77 183.94,39.04 183.62,39.36 v183.62,39.68 183.62,40.95 183.31,41.27 U2.13 | 178.22,36.82 C5.1 | 168.38,53.33 168.06,53.01 | 169.02,58.09 169.65,57.46 169.65,55.55 169.97,55.23 C7.1 | 169.02,58.09 167.56,58.09 167.11,57.64 167.11,54.6 168.38,53.33 | 168.38,53.33 C16.1 | 169.02,58.09 170.29,59.36 v170.29,61.9
  Top 0.813: 215.06,38.41 216.32,39.68 P12.1 | 198.54,51.74 198.54,50.16 | IC8.14 199.18,33.65 | 196.32,33.65 193.15,36.82 193.15,51.74 | 198.54,51.74 195.69,51.74 | P11.4 200.7,59.45 200.7,53.42 198.54,51.74 | TP26.TP C10.+ | 155.37,20.95 IC5.2 | 155.37,20.95 IC5.4 | 155.37,14.6 155.37,20.95 | 168.06,53.01 U2.28 | 156.95,50.47 160.44,53.97 P10.4 | P7.3 156.95,50.47 | 156.95,20.95 156.99,37.86 156.99,42.53 159.18,44.72 159.18,48.25 156.95,50.47
  Bottom 0.406: 158.86,48.88 159.18,48.57 R10.2 158.86,48.88 | 158.86,48.88 P7.3 | P9.6 180.45,61.9 v170.29,61.9 162.03,61.9 P10.4 | 174.41,48.88 158.86,48.88
  Bottom 0.813: 214.42,50.79 204.9,60.31 P11.4 | 214.42,50.79 P12.1 | 174.41,48.88 v183.62,39.68 193.61,39.67 194.81,40.87 195.85,41.9 198.28,41.9 199.18,41 200.5,39.68 203.31,39.68 214.42,50.79
+3V2  (via drill 0.61)  (1 unrouted)
  Top 0.406: 142.06,38.41 R22.2 | 125.55,50.16 U$3.VDD | 125.55,51.74 125.55,52.7 IC9.8 | 126.18,33.65 C27.1 | 120.15,51.74 119.83,51.74 R21.2 | 120.15,51.74 122.37,51.74 C21.1 122.69,51.74 | R20.2 117.29,52.06 119.83,52.06 R21.2 | 123.32,33.65 IC12.14 | 120.15,51.74 R21.2 | C22.+ 82.36,14.6 | 105.22,36.82 103.95,36.82 | 103.95,36.82 101.42,36.82 R25.1 | 103.95,36.82 C26.1 | 105.22,36.82 109.99,36.82 110.94,37.77 110.94,39.04 110.62,39.36 v110.62,39.68 110.62,40.95 110.31,41.27 U3.13 | 105.22,36.82 C19.1 | 95.38,53.33 95.06,53.01 | 96.02,58.09 96.65,57.46 96.65,55.55 96.97,55.23 C20.1 | 96.02,58.09 94.56,58.09 94.11,57.64 94.11,54.6 95.38,53.33 | 95.38,53.33 C25.1 | 96.02,58.09 97.29,59.36 v97.29,61.9
  Top 0.813: 142.06,38.41 143.32,39.68 P18.1 | 125.55,51.74 125.55,50.16 | IC12.14 126.18,33.65 | 123.32,33.65 120.15,36.82 120.15,51.74 | 125.55,51.74 122.69,51.74 | P17.4 127.7,59.45 127.7,53.42 125.55,51.74 | TP39.TP C22.+ | 82.36,20.95 IC10.2 | 82.36,20.95 IC10.4 | 82.36,14.6 82.36,20.95 | 95.06,53.01 U3.28 | 83.95,50.47 87.44,53.97 P16.4 | 83.95,50.47 P13.3 | 83.95,20.95 83.99,37.86 83.99,42.53 86.17,44.72 86.17,48.25 83.95,50.47
  Bottom 0.406: 85.86,48.88 86.17,48.57 R19.2 85.86,48.88 | P13.3 85.86,48.88 | P15.6 107.45,61.9 v97.29,61.9 89.03,61.9 P16.4 | 85.86,48.88 101.42,48.88
  Bottom 0.813: 141.42,50.79 131.9,60.31 P17.4 | 141.42,50.79 P18.1 | 101.42,48.88 v110.62,39.68 120.61,39.67 121.81,40.87 122.85,41.9 125.28,41.9 126.18,41 127.5,39.68 130.31,39.68 141.42,50.79
+3V3  (via drill 0.61)  (1 unrouted)
  Top 0.406: 69.06,38.41 R6.2 | 52.55,50.16 U$1.VDD | 52.55,51.74 52.55,52.7 IC1.8 | 53.18,33.65 C2.1 | 47.15,51.74 46.83,51.74 R4.2 | 47.15,51.74 49.37,51.74 C9.1 49.69,51.74 | R3.2 44.29,52.06 46.83,52.06 R4.2 | 50.32,33.65 IC3.14 | 47.15,51.74 R4.2 | C12.+ 9.37,14.6 | 32.23,36.82 30.95,36.82 | 30.95,36.82 28.41,36.82 R2.1 | 30.95,36.82 C1.1 | 32.23,36.82 36.99,36.82 37.94,37.77 37.94,39.04 37.62,39.36 v37.62,39.68 37.62,40.95 37.3,41.27 U1.13 | 32.23,36.82 C3.1 | 22.38,53.33 22.07,53.01 | 23.02,58.09 23.65,57.46 23.65,55.55 23.97,55.23 C6.1 | 23.02,58.09 21.56,58.09 21.11,57.64 21.11,54.6 22.38,53.33 | 22.38,53.33 C4.1 | 23.02,58.09 24.29,59.36 v24.29,61.9
  Top 0.813: 69.06,38.41 70.33,39.68 P5.1 | 52.55,51.74 52.55,50.16 | IC3.14 53.18,33.65 | 50.32,33.65 47.15,36.82 47.15,51.74 | 52.55,51.74 49.69,51.74 | P4.4 54.7,59.45 54.7,53.42 52.55,51.74 | TP13.TP C12.+ | 9.37,20.95 IC7.2 | 9.37,20.95 IC7.4 | 9.37,14.6 9.37,20.95 | 22.07,53.01 U1.28 | 10.95,50.47 14.45,53.97 P3.4 | 10.95,50.47 P1.3 | 10.95,20.95 10.99,37.86 10.99,42.53 13.18,44.72 13.18,48.25 10.95,50.47
  Bottom 0.406: 12.86,48.88 13.18,48.57 R1.2 12.86,48.88 | P1.3 12.86,48.88 | P2.6 34.45,61.9 v24.29,61.9 16.03,61.9 P3.4 | 12.86,48.88 28.41,48.88
  Bottom 0.813: 68.42,50.79 58.9,60.31 P4.4 | 68.42,50.79 P5.1 | 28.41,48.88 v37.62,39.68 47.61,39.67 48.81,40.87 49.85,41.9 52.28,41.9 53.18,41 54.51,39.68 57.31,39.68 68.42,50.79
+3V4  (via drill 0.61)  (1 unrouted)
  Top 0.406: 69.06,106.41 R31.2 | 52.55,118.16 U$4.VDD | 52.55,119.74 52.55,120.69 IC13.8 | 53.18,101.64 C36.1 | 47.15,119.74 46.83,119.74 R30.2 | 47.15,119.74 49.37,119.74 C30.1 49.69,119.74 | R29.2 44.29,120.06 46.83,120.06 R30.2 | 50.32,101.64 IC16.14 | 47.15,119.74 R30.2 | C31.+ 9.37,82.59 | 32.23,104.82 30.95,104.82 | 30.95,104.82 28.41,104.82 R34.1 | 30.95,104.82 C35.1 | 32.23,104.82 36.99,104.82 37.94,105.77 37.94,107.04 37.62,107.36 v37.62,107.68 37.62,108.95 37.3,109.27 U4.13 | 32.23,104.82 C28.1 | 22.38,121.33 22.07,121.01 | 23.02,126.09 23.65,125.46 23.65,123.55 23.97,123.23 C29.1 | 23.02,126.09 21.56,126.09 21.11,125.64 21.11,122.6 22.38,121.33 | 22.38,121.33 C34.1 | 23.02,126.09 24.29,127.36 v24.29,129.9
  Top 0.813: 69.06,106.41 70.33,107.68 P24.1 | 52.55,119.74 52.55,118.16 | IC16.14 53.18,101.64 | 50.32,101.64 47.15,104.82 47.15,119.74 | 52.55,119.74 49.69,119.74 | P23.4 54.7,127.45 54.7,121.42 52.55,119.74 | TP52.TP C31.+ | 9.37,88.94 IC14.2 | 9.37,88.94 IC14.4 | 9.37,82.59 9.37,88.94 | 22.07,121.01 U4.28 | 10.95,118.47 14.45,121.97 P22.4 | 10.95,118.47 P19.3 | 10.95,88.94 10.99,105.86 10.99,110.53 13.18,112.72 13.18,116.25 10.95,118.47
  Bottom 0.406: 12.86,116.89 13.18,116.57 R28.2 12.86,116.89 | P19.3 12.86,116.89 | P21.6 34.45,129.9 v24.29,129.9 16.03,129.9 P22.4 | 12.86,116.89 28.41,116.89
  Bottom 0.813: 68.42,118.79 58.9,128.31 P23.4 | 68.42,118.79 P24.1 | 28.41,116.89 v37.62,107.68 47.61,107.67 48.81,108.86 49.85,109.9 52.28,109.9 53.18,109 54.51,107.68 57.31,107.68 68.42,118.79
+3V5  (via drill 0.61)  (1 unrouted)
  Top 0.406: 142.06,106.41 R40.2 | 125.55,118.16 U$5.VDD | 125.55,119.74 125.55,120.69 IC17.8 | 126.18,101.64 C45.1 | 120.15,119.74 119.83,119.74 R39.2 | 120.15,119.74 122.37,119.74 C39.1 122.69,119.74 | R38.2 117.29,120.06 119.83,120.06 R39.2 | 123.32,101.64 IC20.14 | 120.15,119.74 R39.2 | C40.+ 82.36,82.59 | 105.22,104.82 103.95,104.82 | 103.95,104.82 101.42,104.82 R43.1 | 103.95,104.82 C44.1 | 105.22,104.82 109.99,104.82 110.94,105.77 110.94,107.04 110.62,107.36 v110.62,107.68 110.62,108.95 110.31,109.27 U5.13 | 105.22,104.82 C37.1 | 95.38,121.33 95.06,121.01 | 96.02,126.09 96.65,125.46 96.65,123.55 96.97,123.23 C38.1 | 96.02,126.09 94.56,126.09 94.11,125.64 94.11,122.6 95.38,121.33 | 95.38,121.33 C43.1 | 96.02,126.09 97.29,127.36 v97.29,129.9
  Top 0.813: 142.06,106.41 143.32,107.68 P30.1 | 125.55,119.74 125.55,118.16 | IC20.14 126.18,101.64 | 123.32,101.64 120.15,104.82 120.15,119.74 | 125.55,119.74 122.69,119.74 | P29.4 127.7,127.45 127.7,121.42 125.55,119.74 | TP65.TP C40.+ | 82.36,88.94 IC18.2 | 82.36,88.94 IC18.4 | 82.36,82.59 82.36,88.94 | 95.06,121.01 U5.28 | 83.95,118.47 87.44,121.97 P28.4 | P25.3 83.95,118.47 | 83.95,88.94 83.99,105.86 83.99,110.53 86.17,112.72 86.17,116.25 83.95,118.47
  Bottom 0.406: 85.86,116.89 86.17,116.57 R37.2 85.86,116.89 | 85.86,116.89 P25.3 | P27.6 107.45,129.9 v97.29,129.9 89.03,129.9 P28.4 | 101.42,116.89 85.86,116.89
  Bottom 0.813: 141.42,118.79 131.9,128.31 P29.4 | 141.42,118.79 P30.1 | 101.42,116.89 v110.62,107.68 120.61,107.67 121.81,108.86 122.85,109.9 125.28,109.9 126.18,109 127.5,107.68 130.31,107.68 141.42,118.79
+3V6  (via drill 0.61)  (1 unrouted)
  Top 0.406: 215.06,106.41 R49.2 | 198.54,118.16 U$6.VDD | 198.54,119.74 198.54,120.69 IC21.8 | 199.18,101.64 C54.1 | 193.15,119.74 192.83,119.74 R48.2 | 193.15,119.74 195.37,119.74 C48.1 195.69,119.74 | R47.2 190.29,120.06 192.83,120.06 R48.2 | 196.32,101.64 IC24.14 | 193.15,119.74 R48.2 | C49.+ 155.37,82.59 | 178.22,104.82 176.96,104.82 | 176.96,104.82 174.41,104.82 R52.1 | 176.96,104.82 C53.1 | 178.22,104.82 182.99,104.82 183.94,105.77 183.94,107.04 183.62,107.36 v183.62,107.68 183.62,108.95 183.31,109.27 U6.13 | 178.22,104.82 C46.1 | 168.38,121.33 168.06,121.01 | 169.02,126.09 169.65,125.46 169.65,123.55 169.97,123.23 C47.1 | 169.02,126.09 167.56,126.09 167.11,125.64 167.11,122.6 168.38,121.33 | 168.38,121.33 C52.1 | 169.02,126.09 170.29,127.36 v170.29,129.9
  Top 0.813: 215.06,106.41 216.32,107.68 P36.1 | 198.54,119.74 198.54,118.16 | IC24.14 199.18,101.64 | 196.32,101.64 193.15,104.82 193.15,119.74 | 198.54,119.74 195.69,119.74 | P35.4 200.7,127.45 200.7,121.42 198.54,119.74 | TP78.TP C49.+ | 155.37,88.94 IC22.2 | 155.37,88.94 IC22.4 | 155.37,82.59 155.37,88.94 | 168.06,121.01 U6.28 | 156.95,118.47 160.44,121.97 P34.4 | 156.95,118.47 P31.3 | 156.95,88.94 156.99,105.86 156.99,110.53 159.18,112.72 159.18,116.25 156.95,118.47
  Bottom 0.406: 158.86,116.89 159.18,116.57 R46.2 158.86,116.89 | P31.3 158.86,116.89 | P33.6 180.45,129.9 v170.29,129.9 162.03,129.9 P34.4 | 158.86,116.89 174.41,116.89
  Bottom 0.813: 214.42,118.79 204.9,128.31 P35.4 | 214.42,118.79 P36.1 | 174.41,116.89 v183.62,107.68 193.61,107.67 194.81,108.86 195.85,109.9 198.28,109.9 199.18,109 200.5,107.68 203.31,107.68 214.42,118.79
+5V  (via drill 0.61)
  Top 0.406: IC4.8 21.75,29.2 C11.1 21.75,29.52 | TP12.TP 13.81,23.48 IC7.3 | 18.25,23.48 C13.+ 18.25,23.17 | 38.89,34.6 40.48,34.6 R7.1 | 38.89,34.6 37.3,34.6 R8.1 | 38.89,34.6 38.89,20.95 36.35,18.41 | P5.3 71.91,52.38 v71.91,25.07
  Top 0.813: 13.81,23.48 18.25,23.48 18.25,25.71 21.75,29.2 | 36.35,18.41 CONN2.P$7 34.45,17.45 34.45,7.29 | 18.25,23.17 21.43,19.99 21.43,13.01 26.51,7.29 34.45,7.29 | 34.45,7.29 v37.3,5.07
  Bottom 0.406: v71.91,25.07 65.25,18.41 CONN1.P$7 58.58,18.41 58.58,7.61 D2.2 58.26,7.29 56.67,5.07 v37.3,5.07
+5V1  (via drill 0.61)
  Top 0.406: IC6.8 167.75,29.2 C15.1 167.75,29.52 | TP25.TP 159.81,23.48 IC5.3 | 164.25,23.48 C14.+ 164.25,23.17 | 184.89,34.6 186.48,34.6 R14.1 | 184.89,34.6 183.31,34.6 R15.1 | 184.89,34.6 184.89,20.95 182.35,18.41 | P12.3 217.91,52.38 v217.91,25.07
  Top 0.813: 159.81,23.48 164.25,23.48 164.25,25.71 167.75,29.2 | 182.35,18.41 CONN4.P$7 180.45,17.45 180.45,7.29 | 164.25,23.17 167.43,19.99 167.43,13.01 172.51,7.29 180.45,7.29 | v183.31,5.07 180.45,7.29
  Bottom 0.406: v217.91,25.07 211.25,18.41 CONN3.P$7 204.58,18.41 204.58,7.61 D5.2 204.26,7.29 202.67,5.07 v183.31,5.07
+5V2  (via drill 0.61)
  Top 0.406: IC11.8 94.75,29.2 C24.1 94.75,29.52 | TP38.TP 86.81,23.48 IC10.3 | 91.25,23.48 C23.+ 91.25,23.17 | 111.89,34.6 113.48,34.6 R23.1 | 111.89,34.6 110.31,34.6 R24.1 | 111.89,34.6 111.89,20.95 109.35,18.41 | P18.3 144.91,52.38 v144.91,25.07
  Top 0.813: 86.81,23.48 91.25,23.48 91.25,25.71 94.75,29.2 | 109.35,18.41 CONN6.P$7 107.45,17.45 107.45,7.29 | 91.25,23.17 94.43,19.99 94.43,13.01 99.51,7.29 107.45,7.29 | 107.45,7.29 v110.31,5.07
  Bottom 0.406: v144.91,25.07 138.25,18.41 CONN5.P$7 131.58,18.41 131.58,7.61 D8.2 131.26,7.29 129.67,5.07 v110.31,5.07
+5V3  (via drill 0.61)
  Top 0.406: IC15.8 21.75,97.2 C33.1 21.75,97.52 | TP51.TP 13.81,91.48 IC14.3 | 18.25,91.48 C32.+ 18.25,91.17 | 38.89,102.6 40.48,102.6 R32.1 | 38.89,102.6 37.3,102.6 R33.1 | 38.89,102.6 38.89,88.94 36.35,86.41 | P24.3 71.91,120.38 v71.91,93.07
  Top 0.813: 13.81,91.48 18.25,91.48 18.25,93.71 21.75,97.2 | 36.35,86.41 CONN8.P$7 34.45,85.45 34.45,75.29 | 18.25,91.17 21.43,87.99 21.43,81.01 26.51,75.29 34.45,75.29 | 34.45,75.29 v37.3,73.07
  Bottom 0.406: v71.91,93.07 65.25,86.41 CONN7.P$7 58.58,86.41 58.58,75.61 D11.2 58.26,75.29 56.67,73.07 v37.3,73.07
+5V4  (via drill 0.61)
  Top 0.406: IC19.8 94.75,97.2 C42.1 94.75,97.52 | TP64.TP 86.81,91.48 IC18.3 | 91.25,91.48 C41.+ 91.25,91.17 | 111.89,102.6 113.48,102.6 R41.1 | 111.89,102.6 110.31,102.6 R42.1 | 111.89,102.6 111.89,88.94 109.35,86.41 | P30.3 144.91,120.38 v144.91,93.07
  Top 0.813: 86.81,91.48 91.25,91.48 91.25,93.71 94.75,97.2 | 109.35,86.41 CONN10.P$7 107.45,85.45 107.45,75.29 | 91.25,91.17 94.43,87.99 94.43,81.01 99.51,75.29 107.45,75.29 | v110.31,73.07 107.45,75.29
  Bottom 0.406: v144.91,93.07 138.25,86.41 CONN9.P$7 131.58,86.41 131.58,75.61 D14.2 131.26,75.29 129.67,73.07 v110.31,73.07
+5V5  (via drill 0.61)
  Top 0.406: IC23.8 167.75,97.2 C51.1 167.75,97.52 | TP77.TP 159.81,91.48 IC22.3 | 164.25,91.48 C50.+ 164.25,91.17 | 184.89,102.6 186.48,102.6 R50.1 | 184.89,102.6 183.31,102.6 R51.1 | 184.89,102.6 184.89,88.94 182.35,86.41 | P36.3 217.91,120.38 v217.91,93.07
  Top 0.813: 159.81,91.48 164.25,91.48 164.25,93.71 167.75,97.2 | 182.35,86.41 CONN12.P$7 180.45,85.45 180.45,75.29 | 164.25,91.17 167.43,87.99 167.43,81.01 172.51,75.29 180.45,75.29 | 180.45,75.29 v183.31,73.07